# Altium PCB RasPiHAT-MOSFET.PcbDoc
Units mil, origin at the board's own origin, x right, y up, seen from the top; angles counter-clockwise.
Board outline 4248 x 2205 mil, 2 copper layers (Top, Bottom), stack 61.811 mil thick; 125 components, 92 nets, 378 pads, 166 vias.
Unrouted connection lines stored in the file: 21.
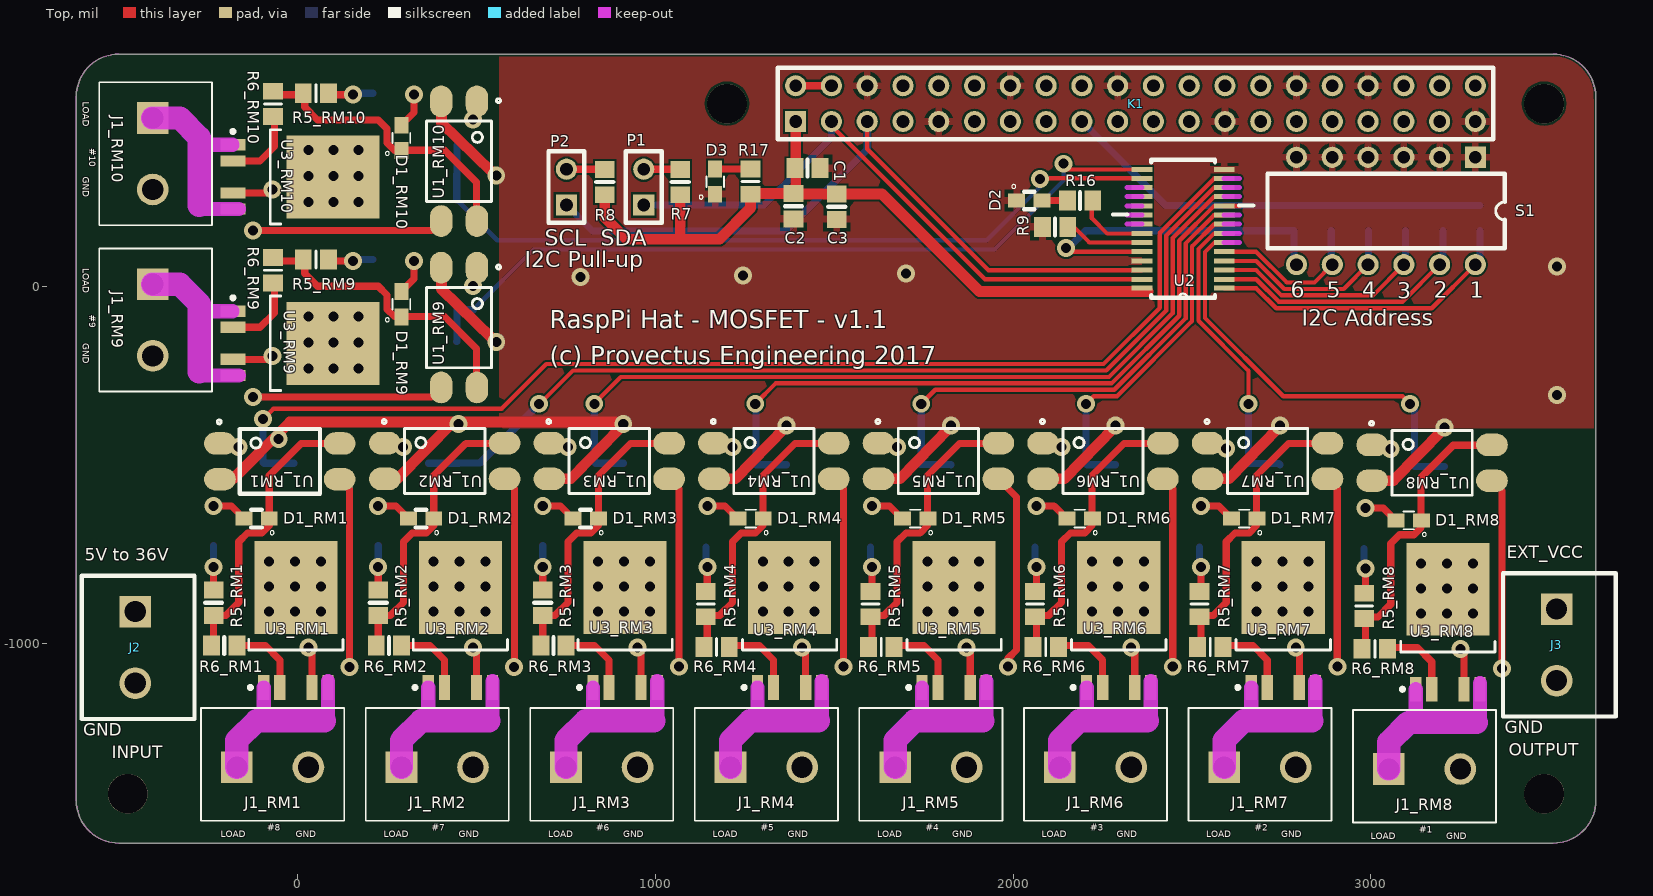
[diagram p0: Top view]
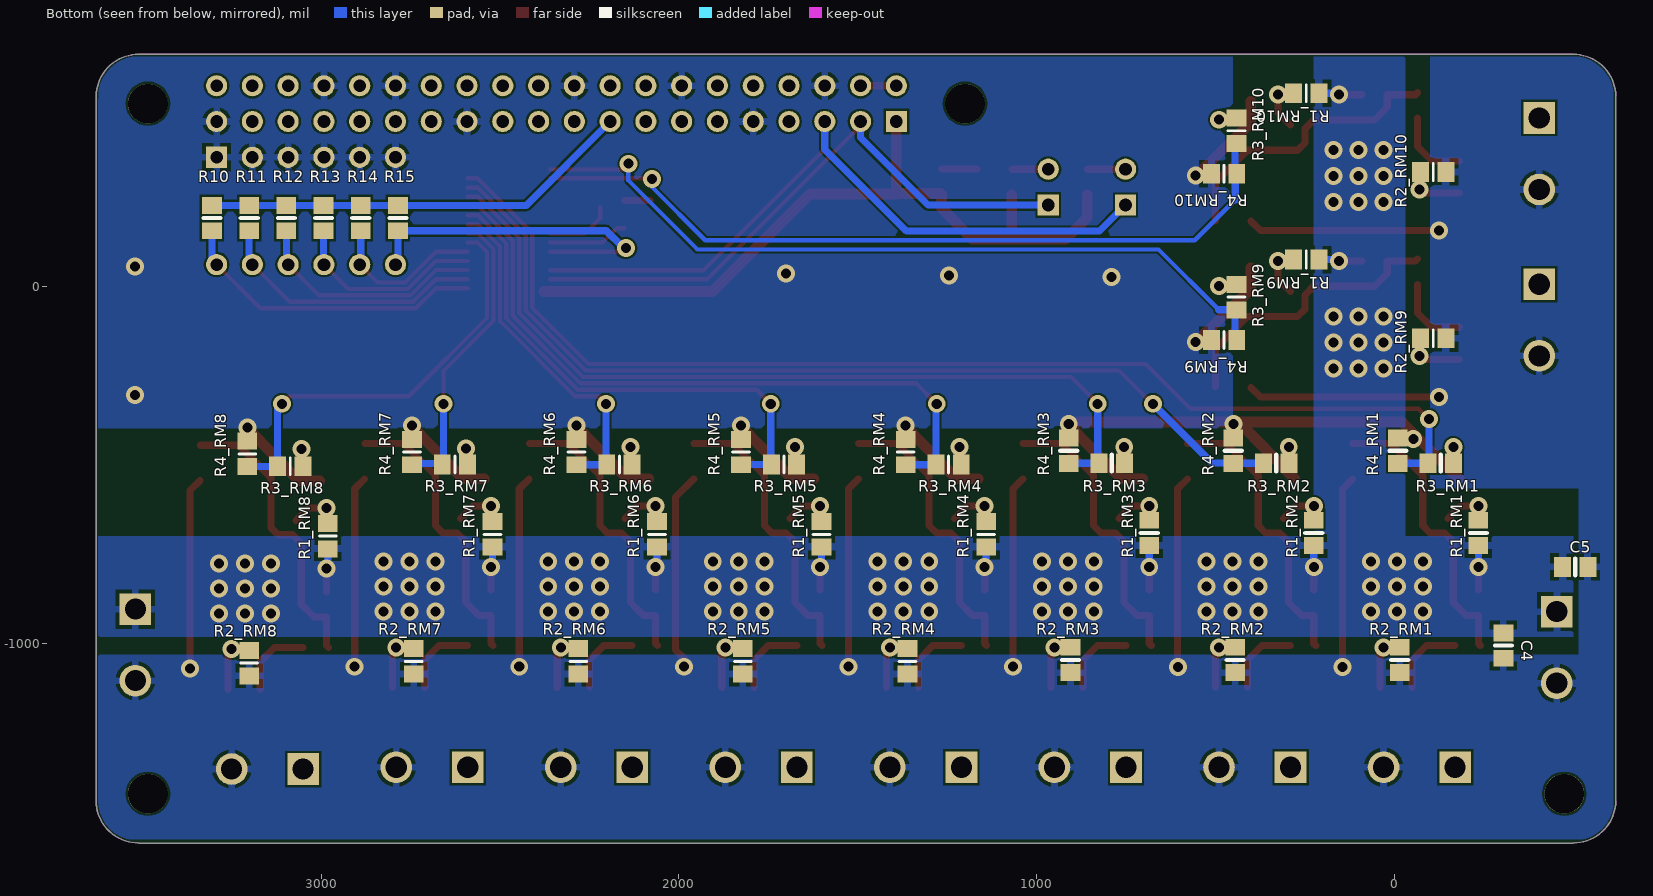
[diagram p1: Bottom view, seen from below]

## Layer stack, top to bottom
Top Solder: solder mask 0.4, Solder Resist, Dk 3.5
Top: signal copper 1.378
Dielectric 1: core 59.0551, FR-4, Dk 4.8
Bottom: signal copper 1.378
Bottom Solder: solder mask 0.4, Solder Resist, Dk 3.5

## Board outline
-500,-1557 cw(c-500,-1438) -619,-1438 -618.5,-1438 -618.5,530 -619,530 cw(c-500.5,529.5) -500,648 3509.5,648 cw(c3510,529.5) 3628.5,530 3629,530 3629,-1438 cw(c3510,-1438) 3510,-1557

## Design rules (kind name [scope] priority, off if disabled: settings)
Clearance mdViaVia [IsVia vs IsVia] p1: gap=6 ignorepadtopadclearanceinfootprint=FALSE except(0: Arc-Hole Track-Hole SMDPad-Hole THPad-Hole Via-Hole Fill-Hole Poly-Hole Region-Hole Text-Hole)
Clearance mdPadVia [IsPad vs IsVia] p2: gap=6 ignorepadtopadclearanceinfootprint=FALSE except(0: Arc-Hole Track-Hole SMDPad-Hole THPad-Hole Via-Hole Fill-Hole Poly-Hole Region-Hole Text-Hole)
Clearance mdPadPad [IsPad vs IsPad] p3: gap=6 ignorepadtopadclearanceinfootprint=FALSE except(0: Arc-Hole Track-Hole SMDPad-Hole THPad-Hole Via-Hole Fill-Hole Poly-Hole Region-Hole Text-Hole)
Clearance mdWireVia [(InLayerClass('Signal Layers') AND IsTrack) vs IsVia] p4: gap=6 ignorepadtopadclearanceinfootprint=FALSE except(0: Arc-Hole Track-Hole SMDPad-Hole THPad-Hole Via-Hole Fill-Hole Poly-Hole Region-Hole Text-Hole)
Clearance mdWirePad [(InLayerClass('Signal Layers') AND IsTrack) vs IsPad] p5: gap=6 ignorepadtopadclearanceinfootprint=FALSE except(0: Arc-Hole Track-Hole SMDPad-Hole THPad-Hole Via-Hole Fill-Hole Poly-Hole Region-Hole Text-Hole)
Clearance mdWireWire [(InLayerClass('Signal Layers') AND IsTrack) vs (InLayerClass('Signal Layers') AND IsTrack)] p6: gap=6 ignorepadtopadclearanceinfootprint=FALSE except(0: Arc-Hole Track-Hole SMDPad-Hole THPad-Hole Via-Hole Fill-Hole Poly-Hole Region-Hole Text-Hole)
Clearance [All] p7: gap=6 ignorepadtopadclearanceinfootprint=FALSE except(0: Arc-Hole Track-Hole SMDPad-Hole THPad-Hole Via-Hole Fill-Hole Poly-Hole Region-Hole Text-Hole)
HoleSize [All] p1: absolutevalues=TRUE maxlimit=100000 minlimit=12 maxpercent=80.000 minpercent=20.000
HoleToHoleClearance [All] p1: gap=8 allowstackedmicrovias=TRUE
PolygonConnect PolygonConnect_DIRECT [HasFootprint('INF-PG-TO252-5-11_N')] p1: connectstyle=Direct reliefconductorwidth=30 reliefentries=4 polygonreliefangle="90 Angle" airgapwidth=10
PolygonConnect ThermalVias [IsVia] p2: connectstyle=Direct reliefconductorwidth=10 reliefentries=4 polygonreliefangle="90 Angle" airgapwidth=10
PolygonConnect [All] p3: connectstyle=Relief reliefconductorwidth=20 reliefentries=4 polygonreliefangle="90 Angle" airgapwidth=10
RoomDefinition RM10 [InComponentClass('RM10')] p1: confinementstyle=ConfineIn formatcopy=TRUE lockcomponents=FALSE outline -615,580 -615,125 580,125 580,580
RoomDefinition RM9 [InComponentClass('RM9')] p2: confinementstyle=ConfineIn formatcopy=TRUE lockcomponents=FALSE outline -615,115 -615,-340 580,-340 580,115
RoomDefinition RM8 [InComponentClass('RM8')] p3: confinementstyle=ConfineIn formatcopy=TRUE lockcomponents=FALSE outline 2940,-1560 3395,-1560 3395,-365 2940,-365
RoomDefinition RM7 [InComponentClass('RM7')] p4: confinementstyle=ConfineIn formatcopy=TRUE lockcomponents=FALSE outline 2480,-1555 2935,-1555 2935,-360 2480,-360
RoomDefinition RM6 [InComponentClass('RM6')] p5: confinementstyle=ConfineIn formatcopy=TRUE lockcomponents=FALSE outline 2020,-1555 2475,-1555 2475,-360 2020,-360
RoomDefinition RasPiHAT-MOSFET [InComponentClass('RasPiHAT-MOSFET')] p6: confinementstyle=ConfineIn formatcopy=TRUE lockcomponents=FALSE outline 3629,655 -625,655 -625,-1559 3629,-1559
RoomDefinition RM1 [InComponentClass('RM1')] p7: confinementstyle=ConfineIn formatcopy=TRUE lockcomponents=FALSE outline -280,-1555 175,-1555 175,-360 -280,-360
RoomDefinition RM4 [InComponentClass('RM4')] p8: confinementstyle=ConfineIn formatcopy=TRUE lockcomponents=FALSE outline 1100,-1555 1555,-1555 1555,-360 1100,-360
RoomDefinition RM5 [InComponentClass('RM5')] p9: confinementstyle=ConfineIn formatcopy=TRUE lockcomponents=FALSE outline 1560,-1555 2015,-1555 2015,-360 1560,-360
RoomDefinition RM2 [InComponentClass('RM2')] p10: confinementstyle=ConfineIn formatcopy=TRUE lockcomponents=FALSE outline 180,-1555 635,-1555 635,-360 180,-360
RoomDefinition RM3 [InComponentClass('RM3')] p11: confinementstyle=ConfineIn formatcopy=TRUE lockcomponents=FALSE outline 640,-1555 1095,-1555 1095,-360 640,-360
RoutingVias [All] p1: holewidth=28 width=50 viastyle="Through Hole" minholewidth=28 minwidth=50 maxholewidth=28 maxwidth=50
SilkToSilkClearance [All] p1 off: silktosilkclearance=10
SilkToSolderMaskClearance [IsPad] p1 off: minsilkscreentomaskgap=10 clearancetoexposedcopper=TRUE
SolderMaskExpansion [All] p1: expansion=2 istentingtop=FALSE
Width [All] p1: maxlimit=100000 minlimit=6 preferedwidth=10
26 further rules are at their usual default settings.

## Classes and differential pairs
component class RM2: D1_RM2 J1_RM2 R1_RM2 R2_RM2 R3_RM2 R4_RM2 R5_RM2 R6_RM2 R7_Designator3 R8_Designator3 R10_Designator3 R11_Designator3 U1_RM2 U2_Designator3 U3_RM2
component class RM3: D1_RM3 J1_RM3 R1_RM3 R2_RM3 R3_RM3 R4_RM3 R5_RM3 R6_RM3 R7_Designator4 R8_Designator4 R10_Designator4 R11_Designator4 U1_RM3 U2_Designator4 U3_RM3
component class RM4: D1_RM4 J1_RM4 R1_RM4 R2_RM4 R3_RM4 R4_RM4 R5_RM4 R6_RM4 R7_Designator5 R8_Designator5 R10_Designator5 R11_Designator5 U1_RM4 U2_Designator5 U3_RM4
component class RasPiHAT-MOSFET: C1 C2 C3 C4 C5 D2 D3 K1 P1 P2 R7 R8 R9 R10 R11 R12 R13 R14 R15 R16 R17 S1 U2
channel class MOSFETPowerStage: Designator1 Designator2 Designator3 Designator4 Designator5 Designator6
component class RM1: D1_RM1 J1_RM1 R1_RM1 R2_RM1 R3_RM1 R4_RM1 R5_RM1 R6_RM1 U1_RM1 U3_RM1
component class RM5: D1_RM5 J1_RM5 R1_RM5 R2_RM5 R3_RM5 R4_RM5 R5_RM5 R6_RM5 U1_RM5 U3_RM5
component class RM6: D1_RM6 J1_RM6 R1_RM6 R2_RM6 R3_RM6 R4_RM6 R5_RM6 R6_RM6 U1_RM6 U3_RM6
component class RM7: D1_RM7 J1_RM7 R1_RM7 R2_RM7 R3_RM7 R4_RM7 R5_RM7 R6_RM7 U1_RM7 U3_RM7
component class RM8: D1_RM8 J1_RM8 R1_RM8 R2_RM8 R3_RM8 R4_RM8 R5_RM8 R6_RM8 U1_RM8 U3_RM8
component class RM9: D1_RM9 J1_RM9 R1_RM9 R2_RM9 R3_RM9 R4_RM9 R5_RM9 R6_RM9 U1_RM9 U3_RM9
component class RM10: D1_RM10 J1_RM10 R1_RM10 R2_RM10 R3_RM10 R4_RM10 R5_RM10 R6_RM10 U1_RM10 U3_RM10

## Components (designator, comment, footprint, x,y, rotation, side; value= is the part's Value field where it differs from the comment)
C1 "Cap" 6-0805_N 1425,330 r180 top
C2 "Cap" 6-0805_N 1386,223 r90 top
C3 "Cap" 6-0805_N 1507,222 r90 top
C4 "Cap" 6-0805_N -305,-1005 r90 bottom
C5 "Cap" 6-0805_N -505.43,-785 r0 bottom
D1_RM1 "0805_LED" LEDSC200X125X70-2N_598-8160-107F(Primary) -115,-650 r180 top (schematic designator D1)
D1_RM2 "0805_LED" LEDSC200X125X70-2N_598-8160-107F(Primary) 345,-650 r180 top (schematic designator D1)
D1_RM3 "0805_LED" LEDSC200X125X70-2N_598-8160-107F(Primary) 805,-650 r180 top (schematic designator D1)
D1_RM4 "0805_LED" LEDSC200X125X70-2N_598-8160-107F(Primary) 1265.98,-650 r180 top (schematic designator D1)
D1_RM5 "0805_LED" LEDSC200X125X70-2N_598-8160-107F(Primary) 1725.98,-650 r180 top (schematic designator D1)
D1_RM6 "0805_LED" LEDSC200X125X70-2N_598-8160-107F(Primary) 2185.98,-650 r180 top (schematic designator D1)
D1_RM7 "0805_LED" LEDSC200X125X70-2N_598-8160-107F(Primary) 2645.98,-650 r180 top (schematic designator D1)
D1_RM8 "0805_LED" LEDSC200X125X70-2N_598-8160-107F(Primary) 3105.98,-655 r180 top (schematic designator D1)
D1_RM9 "0805_LED" LEDSC200X125X70-2N_598-8160-107F(Primary) 290,-50.98 r90 top (schematic designator D1)
D1_RM10 "0805_LED" LEDSC200X125X70-2N_598-8160-107F(Primary) 290,414.02 r90 top (schematic designator D1)
D2 "0805_LED" LEDSC200X125X70-2N_598-8160-107F(Primary) 2045,239 r0 top
D3 "0805_LED" LEDSC200X125X70-2N_598-8160-107F(Primary) 1167,292 r90 top
J1_RM1 "1760510000" 1760490000 -170,-1345 r0 top (schematic designator J1)
J1_RM2 "1760510000" 1760490000 290,-1345 r0 top (schematic designator J1)
J1_RM3 "1760510000" 1760490000 750,-1345 r0 top (schematic designator J1)
J1_RM4 "1760510000" 1760490000 1210,-1345 r0 top (schematic designator J1)
J1_RM5 "1760510000" 1760490000 1670,-1345 r0 top (schematic designator J1)
J1_RM6 "1760510000" 1760490000 2130,-1345 r0 top (schematic designator J1)
J1_RM7 "1760510000" 1760490000 2590,-1345 r0 top (schematic designator J1)
J1_RM8 "1760510000" 1760490000 3050,-1350 r0 top (schematic designator J1)
J1_RM9 "1760510000" 1760490000 -405,5 r270 top (schematic designator J1)
J1_RM10 "1760510000" 1760490000 -405,470 r270 top (schematic designator J1)
J2 "1760510000" 1760490000 -454,-910 r270 top
J3 "1760510000" 1760490000 3519,-903 r270 top (schematic designator J2)
K1 "PIN20X2" HDR2X20 1392,460 r0 top
P1 "Header 2" HDR1X2 967.27,226.61 r90 top
P2 "Header 2" HDR1X2 751.27,226.61 r90 top
R1_RM1 "Res1" 6-0805_N -235,-690 r90 bottom (schematic designator R1)
R1_RM2 "Res1" 6-0805_N 225,-690 r90 bottom (schematic designator R1)
R1_RM3 "Res1" 6-0805_N 685,-690 r90 bottom (schematic designator R1)
R1_RM4 "Res1" 6-0805_N 1140.97,-694.03 r90 bottom (schematic designator R1)
R1_RM5 "Res1" 6-0805_N 1600.97,-694.03 r90 bottom (schematic designator R1)
R1_RM6 "Res1" 6-0805_N 2060.97,-694.03 r90 bottom (schematic designator R1)
R1_RM7 "Res1" 6-0805_N 2520.97,-694.03 r90 bottom (schematic designator R1)
R1_RM8 "Res1" 6-0805_N 2980.97,-699.03 r90 bottom (schematic designator R1)
R1_RM9 "Res1" 6-0805_N 245.97,74.03 r0 bottom (schematic designator R1)
R1_RM10 "Res1" 6-0805_N 245.97,539.03 r0 bottom (schematic designator R1)
R2_RM1 "Res1" 6-0805_N -15,-1045 r270 bottom (schematic designator R2)
R2_RM2 "Res1" 6-0805_N 445,-1045 r270 bottom (schematic designator R2)
R2_RM3 "Res1" 6-0805_N 905,-1045 r270 bottom (schematic designator R2)
R2_RM4 "Res1" 6-0805_N 1360.97,-1049.03 r270 bottom (schematic designator R2)
R2_RM5 "Res1" 6-0805_N 1820.97,-1049.03 r270 bottom (schematic designator R2)
R2_RM6 "Res1" 6-0805_N 2280.97,-1049.03 r270 bottom (schematic designator R2)
R2_RM7 "Res1" 6-0805_N 2740.97,-1049.03 r270 bottom (schematic designator R2)
R2_RM8 "Res1" 6-0805_N 3200.97,-1054.03 r270 bottom (schematic designator R2)
R2_RM9 "Res1" 6-0805_N -109.03,-145.97 r180 bottom (schematic designator R2)
R2_RM10 "Res1" 6-0805_N -109.03,319.03 r180 bottom (schematic designator R2)
R3_RM1 "Res1" 6-0805_N -130,-495 r180 bottom (schematic designator R3)
R3_RM2 "Res1" 6-0805_N 330,-495 r180 bottom (schematic designator R3)
R3_RM3 "Res1" 6-0805_N 790,-495 r180 bottom (schematic designator R3)
R3_RM4 "Res1" 6-0805_N 1245.97,-499.03 r180 bottom (schematic designator R3)
R3_RM5 "Res1" 6-0805_N 1705.97,-499.03 r180 bottom (schematic designator R3)
R3_RM6 "Res1" 6-0805_N 2165.97,-499.03 r180 bottom (schematic designator R3)
R3_RM7 "Res1" 6-0805_N 2625.97,-499.03 r180 bottom (schematic designator R3)
R3_RM8 "Res1" 6-0805_N 3085.97,-504.03 r180 bottom (schematic designator R3)
R3_RM9 "Res1" 6-0805_N 440.97,-30.97 r90 bottom (schematic designator R3)
R3_RM10 "Res1" 6-0805_N 440.97,434.03 r90 bottom (schematic designator R3)
R4_RM1 "Res1" 6-0805_N -10,-460 r90 bottom (schematic designator R4)
R4_RM2 "Res1" 6-0805_N 450,-460 r90 bottom (schematic designator R4)
R4_RM3 "Res1" 6-0805_N 910,-460 r90 bottom (schematic designator R4)
R4_RM4 "Res1" 6-0805_N 1365.97,-464.03 r90 bottom (schematic designator R4)
R4_RM5 "Res1" 6-0805_N 1825.97,-464.03 r90 bottom (schematic designator R4)
R4_RM6 "Res1" 6-0805_N 2285.97,-464.03 r90 bottom (schematic designator R4)
R4_RM7 "Res1" 6-0805_N 2745.97,-464.03 r90 bottom (schematic designator R4)
R4_RM8 "Res1" 6-0805_N 3205.97,-469.03 r90 bottom (schematic designator R4)
R4_RM9 "Res1" 6-0805_N 475.97,-150.97 r0 bottom (schematic designator R4)
R4_RM10 "Res1" 6-0805_N 475.97,314.03 r0 bottom (schematic designator R4)
R5_RM1 "Res1" 6-0805_N -235,-885 r270 top (schematic designator R5)
R5_RM2 "Res1" 6-0805_N 225,-885 r270 top (schematic designator R5)
R5_RM3 "Res1" 6-0805_N 685,-885 r270 top (schematic designator R5)
R5_RM4 "Res1" 6-0805_N 1140.97,-889.03 r270 top (schematic designator R5)
R5_RM5 "Res1" 6-0805_N 1600.97,-889.03 r270 top (schematic designator R5)
R5_RM6 "Res1" 6-0805_N 2060.97,-889.03 r270 top (schematic designator R5)
R5_RM7 "Res1" 6-0805_N 2520.97,-889.03 r270 top (schematic designator R5)
R5_RM8 "Res1" 6-0805_N 2980.97,-894.03 r270 top (schematic designator R5)
R5_RM9 "Res1" 6-0805_N 50.97,74.03 r180 top (schematic designator R5)
R5_RM10 "Res1" 6-0805_N 50.97,539.03 r180 top (schematic designator R5)
R6_RM1 "Res1" 6-0805_N -205,-1005 r0 top (schematic designator R6)
R6_RM2 "Res1" 6-0805_N 255,-1005 r0 top (schematic designator R6)
R6_RM3 "Res1" 6-0805_N 715,-1005 r0 top (schematic designator R6)
R6_RM4 "Res1" 6-0805_N 1170.97,-1009.03 r0 top (schematic designator R6)
R6_RM5 "Res1" 6-0805_N 1630.97,-1009.03 r0 top (schematic designator R6)
R6_RM6 "Res1" 6-0805_N 2090.97,-1009.03 r0 top (schematic designator R6)
R6_RM7 "Res1" 6-0805_N 2550.97,-1009.03 r0 top (schematic designator R6)
R6_RM8 "Res1" 6-0805_N 3010.97,-1014.03 r0 top (schematic designator R6)
R6_RM9 "Res1" 6-0805_N -69.03,44.03 r270 top (schematic designator R6)
R6_RM10 "Res1" 6-0805_N -69.03,509.03 r270 top (schematic designator R6)
R7 "Res1" 6-0805_N 1069.27,290.61 r90 top
R8 "Res1" 6-0805_N 858.27,290.61 r90 top
R9 "Res1" 6-0805_N 2117,165 r0 top
R10 "Res1" 6-0805_N 3305,190 r270 bottom
R11 "Res1" 6-0805_N 3201,190 r270 bottom
R12 "Res1" 6-0805_N 3097,190 r270 bottom
R13 "Res1" 6-0805_N 2993,190 r270 bottom
R14 "Res1" 6-0805_N 2889,190 r270 bottom
R15 "Res1" 6-0805_N 2785,190 r270 bottom
R16 "Res1" 6-0805_N 2187,239 r180 top
R17 "Res1" 6-0805_N 1266,292 r90 top
S1 "SW DIP-6" DIP-12/SW 3042,210 r180 top
U1_RM1 "PC817X2NIP0F" SOT254P975X400-4N -50,-490 r0 top (schematic designator U1)
U1_RM2 "PC817X2NIP0F" SOT254P975X400-4N 411.02,-488.98 r0 top (schematic designator U1)
U1_RM3 "PC817X2NIP0F" SOT254P975X400-4N 871.02,-488.98 r0 top (schematic designator U1)
U1_RM4 "PC817X2NIP0F" SOT254P975X400-4N 1331.02,-488.98 r0 top (schematic designator U1)
U1_RM5 "PC817X2NIP0F" SOT254P975X400-4N 1791.02,-488.98 r0 top (schematic designator U1)
U1_RM6 "PC817X2NIP0F" SOT254P975X400-4N 2251.02,-488.98 r0 top (schematic designator U1)
U1_RM7 "PC817X2NIP0F" SOT254P975X400-4N 2711.02,-488.98 r0 top (schematic designator U1)
U1_RM8 "PC817X2NIP0F" SOT254P975X400-4N 3171.02,-493.98 r0 top (schematic designator U1)
U1_RM9 "PC817X2NIP0F" SOT254P975X400-4N 451.02,-116.02 r270 top (schematic designator U1)
U1_RM10 "PC817X2NIP0F" SOT254P975X400-4N 451.02,348.98 r270 top (schematic designator U1)
U2 "PCA9685PW" SOP65P640X110-28N 2475,160 r180 top locked
U3_RM1 "BTS443P" INF-PG-TO252-5-11_N -5,-935 r90 top (schematic designator U3)
U3_RM2 "BTS443P" INF-PG-TO252-5-11_N 455,-935 r90 top (schematic designator U3)
U3_RM3 "BTS443P" INF-PG-TO252-5-11_N 915,-935 r90 top (schematic designator U3)
U3_RM4 "BTS443P" INF-PG-TO252-5-11_N 1375,-935 r90 top (schematic designator U3)
U3_RM5 "BTS443P" INF-PG-TO252-5-11_N 1835,-935 r90 top (schematic designator U3)
U3_RM6 "BTS443P" INF-PG-TO252-5-11_N 2295,-935 r90 top (schematic designator U3)
U3_RM7 "BTS443P" INF-PG-TO252-5-11_N 2755,-935 r90 top (schematic designator U3)
U3_RM8 "BTS443P" INF-PG-TO252-5-11_N 3215,-940 r90 top (schematic designator U3)
U3_RM9 "BTS443P" INF-PG-TO252-5-11_N 6,-160 r0 top (schematic designator U3)
U3_RM10 "BTS443P" INF-PG-TO252-5-11_N 6,305 r0 top (schematic designator U3)

## Footprints (in the part's own frame and the unit in brackets; to place one, negate y for a bottom-side part, rotate by r counter-clockwise, add the part's x,y. Pads: shape width x height; smd on the part's side, far side on the other; paste and mask are expansions set on the pad)
6-0805_N [mm] "Chip Resistor, Body 2.0x1.2mm, IPC Medium Density"
  rect 1.2x1.4 smd: 1(-0.9,0) 2(0.9,0)
  silkscreen extent 0,-0.6 0,0.6, body extent -1.07,-0.7 1.07,0.7, height 0.7
1760490000 [mm]
  rect 2.25x2.25 hole 1.5 mask-25.4: 1(0,0)
  round 2.25 hole 1.5 mask-25.4: 2(5.08,0)
  silkscreen extent -2.54,-3.8 7.62,4.2
DIP-12/SW [mm] "DIP Switch; 12 Leads"
  rect 1.5x1.5 hole 0.9: 1(-6.35,-3.81)
  round 1.5 hole 0.9: 2(-3.81,-3.81) 3(-1.27,-3.81) 4(1.27,-3.81) 5(3.81,-3.81) 6(6.35,-3.81) 7(6.35,3.81) 8(3.81,3.81) 9(1.27,3.81) 10(-1.27,3.81) 11(-3.81,3.81) 12(-6.35,3.81)
  silkscreen extent -8.43,-2.65 8.41,2.65
HDR1X2 [mm] "Connector; Header; 2 Position"
  rect 1.5x1.5 hole 0.9: 1(0,0)
  round 1.5 hole 0.9: 2(2.54,0)
  silkscreen extent -1.27,-1.27 3.81,1.27
HDR2X20 [mm] "Connector; Header; 20x2 Position"
  rect 1.5x1.5 hole 0.9: 1(0,0)
  round 1.5 hole 0.9: 2(0,2.54) 3(2.54,0) 4(2.54,2.54) 5(5.08,0) 6(5.08,2.54) 7(7.62,0) 8(7.62,2.54) 9(10.16,0) 10(10.16,2.54) 11(12.7,0) 12(12.7,2.54) 13(15.24,0) 14(15.24,2.54) 15(17.78,0) 16(17.78,2.54) 17(20.32,0) 18(20.32,2.54) 19(22.86,0) 20(22.86,2.54) 21(25.4,0) 22(25.4,2.54) 23(27.94,0) 24(27.94,2.54) 25(30.48,0) 26(30.48,2.54) 27(33.02,0) 28(33.02,2.54) 29(35.56,0) 30(35.56,2.54) 31(38.1,0) 32(38.1,2.54) 33(40.64,0) 34(40.64,2.54) 35(43.18,0) 36(43.18,2.54) 37(45.72,0) 38(45.72,2.54) 39(48.26,0) 40(48.26,2.54)
  silkscreen extent -1.27,-1.27 49.53,3.81
INF-PG-TO252-5-11_N [mm] "DPAK, 5-Leads, Body 6.5x6.12mm, Pitch 1.14mm, IPC Medium Density"
  rect 1.75x0.8 smd: 1(-4.75,2.28) 2(-4.75,1.14) 4(-4.75,-1.14) 5(-4.75,-2.28)
  rect 6.6x5.9 smd: 3(2.35,0)
  silkscreen extent -4.87,-3.35 -1.35,3.35, body extent -2.1,-3.32 4.12,3.32, height 2.35
LEDSC200X125X70-2N_598-8160-107F(Primary) [mm]
  rect 1.2x1 smd paste-25.4 mask-25.4: A(0.9,0) C(-0.9,0)
  silkscreen extent -1.24,-0.63 0.38,1.14
SOP65P640X110-28N [mil]
  rect 58x14 smd paste-1000 mask-1000: 1(-115,166) 2(-115,141) 3(-115,115) 4(-115,90) 5(-115,64) 6(-115,38) 7(-115,13) 8(-115,-13) 9(-115,-38) 10(-115,-64) 11(-115,-90) 12(-115,-115) 13(-115,-141) 14(-115,-166) 15(115,-166) 16(115,-141) 18(115,-90) 19(115,-64) 20(115,-38) 21(115,-13) 22(115,13) 23(115,38) 24(115,64) 25(115,90) 26(115,115) 27(115,141) 28(115,166)
  rect 58x14 smd paste+0 mask-1000: 17(115,-115)
  silkscreen extent -196,-193 196,193
SOT254P975X400-4N [mm]
  oval 2.25x1.6 smd paste-25.4: 1(-4.25,1.27) 2(-4.25,-1.27) 3(4.25,-1.27) 4(4.25,1.27)
  silkscreen extent -4.44,-2.3 2.85,2.94

## Part data
C1 C2 C3 C4 C5: "Capacitor"
D1_RM1 D1_RM2 D1_RM3 D1_RM4 D1_RM5 D1_RM6 D1_RM7 D1_RM8 D1_RM9 D1_RM10 D2 D3: library part 598-8160-107F, "LED, SMD; 0805; Yellow-Green; Water Clear Lens; 40mcd; 570/575nm"
J1_RM1 J1_RM2 J1_RM3 J1_RM4 J1_RM5 J1_RM6 J1_RM7 J1_RM8 J1_RM9 J1_RM10 J2 J3: "Conn Terminal Block 2 POS 5.08mm Solder ST Thru-Hole 16A"
P1 P2: "Header, 2-Pin"
R1_RM1 R1_RM2 R1_RM3 R1_RM4 R1_RM5 R1_RM6 R1_RM7 R1_RM8 R1_RM9 R1_RM10 R2_RM1 R2_RM2 R2_RM3 R2_RM4 R2_RM5 R2_RM6 R2_RM7 R2_RM8 R2_RM9 R2_RM10 R3_RM1 R3_RM2 R3_RM3 R3_RM4 R3_RM5 R3_RM6 R3_RM7 R3_RM8 R3_RM9 R3_RM10 R4_RM1 R4_RM2 R4_RM3 R4_RM4 R4_RM5 R4_RM6 R4_RM7 R4_RM8 R4_RM9 R4_RM10 R5_RM1 R5_RM2 R5_RM3 R5_RM4 R5_RM5 R5_RM6 R5_RM7 R5_RM8 R5_RM9 R5_RM10 R6_RM1 R6_RM2 R6_RM3 R6_RM4 R6_RM5 R6_RM6 R6_RM7 R6_RM8 R6_RM9 R6_RM10 R7 R8 R9 R10 R11 R12 R13 R14 R15 R16 R17: "Resistor"
S1: "DIP Switch, 6 Position, SPST"
U1_RM1 U1_RM2 U1_RM3 U1_RM4 U1_RM5 U1_RM6 U1_RM7 U1_RM8 U1_RM9 U1_RM10: "PC817 Series 1 Channel 80 V 5000 Vrms General Purpose Photocoupler - DIP-4"
U2: "SMD IC LED DRVR, LIN DIM 25MA, 16 channels, 12bit"
U3_RM1 U3_RM2 U3_RM3 U3_RM4 U3_RM5 U3_RM6 U3_RM7 U3_RM8 U3_RM9 U3_RM10: "Smart High-Side Power Switch, 1 Channel, 7.6 A Load Current, -40 to 150 degC, PG-TO252-5-11, Reel, Green"

## Free pads (board coordinates)
  round 111 hole 111: 1(-475,-1419) 1(1200,510) 1(3484,-1419) 1(3484,510)

## Via types
v1: diameter 50, hole 28, Top to Bottom, 166 vias

## Nets (pads, with @x,y where several pads share a name; then routed paths per layer and width w, separated by ;. In a path a pad name is that pad's centre, name@x,y a point inside that pad or via, vN(x,y) a via of type N, cw(c..) or ccw(c..) an arc to the next point about the centre after c; other vN are vias at no path point)
+3V3: C1.2 C2.2 C3.2 K1.1 K1.17 R7.1 R8.1 R10.1 R11.1 R12.1 R13.1 R14.1 R15.1 R17.1 U2.28 | length 3326.5
  Top w30: R8.1 858.27,191.73 919,131 1069.27,131 ; R7.1 1069.27,131 ; C2.2 1267.87,258.43 R17.1 1266,218 1179,131 1069.27,131 ; K1.1 1392,257.43 C3.2 1633.57,257.43 1906,-15 2377,-15
  Bottom w20: K1.17 2426.57,225.43 R15.1 R14.1 R13.1 R12.1 R11.1 R10.1
+5V: K1.2 K1.4 | length 100
  Top w20: K1.2 K1.4
CH1: R3_RM8.1 R4_RM8.1 U2.6 | length 1186.5
  Top w12: U2.6 2563,122 2536,95 2536,-89 2755,-308 3088,-308 v1(3109,-329)
  Bottom w20: v1(3109,-329) 3121.4,-341.4 R3_RM8.1 3205.54,-504.03 R4_RM8.1
CH2: R3_RM7.1 R4_RM7.1 U2.7 | length 836.7
  Top w12: U2.7 2561.46,147 2518,103.54 2518,-97 2658,-237 v1(2658,-329)
  Bottom w20: v1(2658,-329) 2658,-495.63 2742.13,-495.63 R4_RM7.1
CH3: R3_RM6.1 R4_RM6.1 U2.8 | length 967
  Top w12: v1(2204,-329) 2225,-308 2290,-308 2500,-98 2500,111 2562,173 U2.8
  Bottom w20: v1(2204,-329) 2204,-496.43 2207.03,-499.46 R4_RM6.1
CH4: R3_RM5.1 R4_RM5.1 U2.9 | length 1443.5
  Top w12: v1(1743,-329) 1782,-290 2282.54,-290 2482,-90.54 2482,119 2561,198 U2.9
  Bottom w20: v1(1743,-329) 1743,-497.43 R3_RM5.1 1825.54,-499.03 R4_RM5.1
CH5: R3_RM4.1 R4_RM4.1 U2.10 | length 1960.7
  Top w12: v1(1279,-329) 1336,-272 2275.09,-272 2464,-83.09 2464,126.63 2561.37,224 U2.10
  Top w14: U2.10 2632,224
  Bottom w20: v1(1279,-329) 1281.4,-331.4 R3_RM4.1 1281.83,-499.46 R4_RM4.1
CH6: R3_RM3.1 R4_RM3.1 U2.11 | length 2358.5
  Top w12: v1@836,-321 903,-254 2267.63,-254 2446,-75.63 2446,134.09 2561.91,250 U2.11
  Bottom w20: v1(829,-329) 829,-491.43 833,-495.43 R4_RM3.1
CH7: R3_RM2.1 R4_RM2.1 U2.12 | length 2740.6
  Top w12: v1@683,-323 770,-236 2260.18,-236 2428,-68.18 2428,141.54 2561.46,275 U2.12
  Bottom w20: R4_RM2.1 365.87,-495.43 R3_RM2.1 509,-495 v1(675,-329)
CH8: R3_RM1.1 R4_RM1.1 U2.13 | length 3297.4
  Top w12: v1(-97,-372) -68,-343 570,-343 695,-218 2252.72,-218 2410,-60.72 2410,149 2562,301 U2.13
  Bottom w20: v1(-97,-372) -97,-492.57 R3_RM1.1 -94.13,-495.43 R4_RM1.1
CH9: R3_RM9.1 R4_RM9.1 U2.15 | length 2225.2
  Top w12: v1(2141,342) 2134,335 2143,326 U2.15
  Bottom w12: R3_RM9.1 R3_RM9.1@445,-66.4 ; 490.6,-66.4 659,102 1948.07,102 2141,294.93 v1(2141,342)
  Bottom w20: R4_RM9.1@444.57,-155 445,-154.57 445,-66.4 490.6,-66.4
CH10: R3_RM10.1 R4_RM10.1 U2.16 | length 2177.6
  Top w12: 2102,301 U2.16
  Bottom w12: R4_RM10.1 R4_RM10.1@444.57,310 ; 444.57,241.43 558,128 1926,128 v1@2076,278 ; v1@2075,279 v1(2075,299)
  Bottom w20: 444.57,241.43 444.57,310 445,310.43 R3_RM10.1@445,394.57
EEPROM_WC: K1.11
EXT_VCC: C4.2 C5.2 J2.1 J3.1 R1_RM1.1 R1_RM2.1 R1_RM3.1 R1_RM4.1 R1_RM5.1 R1_RM6.1 R1_RM7.1 R1_RM8.1 R1_RM9.1 R1_RM10.1 R5_RM1.1 R5_RM2.1 R5_RM3.1 R5_RM4.1 R5_RM5.1 R5_RM6.1 R5_RM7.1 R5_RM8.1 R5_RM9.1 R5_RM10.1 U3_RM1.3 U3_RM2.3 U3_RM3.3 U3_RM4.3 U3_RM5.3 U3_RM6.3 U3_RM7.3 U3_RM8.3 U3_RM9.3 U3_RM10.3 | length 1224.8
  Top w20: R5_RM1.1 v1(-235,-785) ; R5_RM9.1@90.43,70 v1(155,70) ; R5_RM10.1@90.43,535 v1(155,535) ; R5_RM2.1 v1(225,-785) ; R5_RM3.1 v1(685,-785) ; R5_RM4.1@1145,-849.57 v1(1145,-785) ; R5_RM5.1@1605,-849.57 v1(1605,-785) ; R5_RM6.1@2065,-849.57 v1(2065,-785) ; R5_RM7.1@2525,-849.57 v1(2525,-785) ; R5_RM8.1@2985,-854.57 v1(2985,-790)
  Bottom w20: v1(-235,-785) R1_RM1.1 ; v1(155,70) 159.03,74.03 R1_RM9.1 ; v1(155,535) 159.03,539.03 R1_RM10.1 ; v1(225,-785) R1_RM2.1 ; v1(685,-785) R1_RM3.1 ; R1_RM4.1 1140.97,-780.97 v1(1145,-785) ; R1_RM5.1 1600.97,-780.97 v1(1605,-785) ; R1_RM6.1 2060.97,-780.97 v1(2065,-785) ; R1_RM7.1 2520.97,-780.97 v1(2525,-785) ; R1_RM8.1 2980.97,-785.97 v1(2985,-790)
  other v1: 3140,-915 3212.5,-915 3285,-915 -80,-910 -7.5,-910 65,-910 380,-910 452.5,-910 525,-910 840,-910 912.5,-910 985,-910 1300,-910 1372.5,-910 1445,-910 1760,-910 1832.5,-910 1905,-910 2220,-910 2292.5,-910 2365,-910 2680,-910 2752.5,-910 2825,-910 3140,-845 3212.5,-845 3285,-845 -80,-840 -7.5,-840 65,-840 380,-840 452.5,-840 525,-840 840,-840 912.5,-840 985,-840 1300,-840 1372.5,-840 1445,-840 1760,-840 1832.5,-840 1905,-840 2220,-840 2292.5,-840 2365,-840 2680,-840 2752.5,-840 2825,-840 3140,-775 3212.5,-775 3285,-775 -80,-770 -7.5,-770 65,-770 380,-770 452.5,-770 525,-770 840,-770 912.5,-770 985,-770 1300,-770 1372.5,-770 1445,-770 1760,-770 1832.5,-770 1905,-770 2220,-770 2292.5,-770 2365,-770 2680,-770 2752.5,-770 2825,-770 30,-230 100,-230 170,-230 30,-157.5 100,-157.5 170,-157.5 30,-85 100,-85 170,-85 30,235 100,235 170,235 30,307.5 100,307.5 170,307.5 30,380 100,380 170,380
GND: C1.1 C2.1 C3.1 D2.C D3.C K1.6 K1.9 K1.14 K1.20 K1.25 K1.30 K1.34 K1.39 R4_RM1.2 R4_RM2.2 R4_RM3.2 R4_RM4.2 R4_RM5.2 R4_RM6.2 R4_RM7.2 R4_RM8.2 R4_RM9.2 R4_RM10.2 R9.1 S1.1 S1.2 S1.3 S1.4 S1.5 S1.6 U1_RM1.2 U1_RM2.2 U1_RM3.2 U1_RM4.2 U1_RM5.2 U1_RM6.2 U1_RM7.2 U1_RM8.2 U1_RM9.2 U1_RM10.2 U2.14 U2.25 | length 3443.7
  Top w30: U1_RM1.2@-180.98,-538.98 -27.97,-385.97 -21.97,-379.97 434.03,-379.97 U1_RM2.2@279.02,-538.98 ; U1_RM9.2 401.78,-8.36 v1@544,-147 ; U1_RM10.2 401.78,456.64 v1@544,318 ; v1@434.03,-380 886,-380 902,-396 763.36,-538.22 U1_RM3.2 ; U1_RM4.2 1223.36,-538.22 v1@1362,-396 ; U1_RM5.2 1683.36,-538.22 v1@1822,-396 ; U1_RM6.2 2143.36,-538.22 v1@2282,-396 ; U1_RM7.2 2603.36,-538.22 v1@2742,-396 ; U1_RM8.2 3063.36,-543.22 v1@3202,-401
  other v1: -53,-427 3206,-395 1366,-390 1826,-390 2286,-390 2746,-390 450,-386 910.03,-385.97 3520,-305 555.06,-156.06 790,25 1245,30 1700,35 3520,55 555.06,308.94
INTERRUPT: K1.7
NetD1_RM1_A: D1_RM1.A R1_RM1.2 | length 99.1
  Top w20: v1(-235,-615) -185.43,-615 D1_RM1.A
NetD1_RM1_C: D1_RM1.C R5_RM1.2 R6_RM1.1 U1_RM1.4 | length 819.7
  Top w20: R6_RM1.1 -235,-999.57 R5_RM1.2 -200.43,-920.43 -164.57,-884.57 -164.57,-714.57 -140,-690 -100,-690 -79.57,-669.57 D1_RM1.C -79.57,-529.57 10,-440 U1_RM1.4
NetD1_RM2_A: D1_RM2.A R1_RM2.2 | length 99.1
  Top w20: v1(225,-615) 274.57,-615 D1_RM2.A
NetD1_RM2_C: D1_RM2.C R5_RM2.2 R6_RM2.1 U1_RM2.4 | length 819.7
  Top w20: R6_RM2.1 225,-999.57 R5_RM2.2 259.57,-920.43 295.43,-884.57 295.43,-714.57 320,-690 360,-690 380.43,-669.57 D1_RM2.C 380.43,-529.57 470,-440 U1_RM2.4@577.32,-440
NetD1_RM3_A: D1_RM3.A R1_RM3.2 | length 99.1
  Top w20: v1(685,-615) 734.57,-615 D1_RM3.A
NetD1_RM3_C: D1_RM3.C R5_RM3.2 R6_RM3.1 U1_RM3.4 | length 819.7
  Top w20: R6_RM3.1 685,-999.57 R5_RM3.2 719.57,-920.43 755.43,-884.57 755.43,-714.57 780,-690 820,-690 840.43,-669.57 D1_RM3.C 840.43,-529.57 930,-440 U1_RM3.4@1037.32,-440
NetD1_RM4_A: D1_RM4.A R1_RM4.2 | length 99.1
  Top w20: v1(1145,-615) 1194.57,-615 D1_RM4.A@1229.57,-650
NetD1_RM4_C: D1_RM4.C R5_RM4.2 R6_RM4.1 U1_RM4.4 | length 819.7
  Top w20: R6_RM4.1@1139.57,-1005 1145,-999.57 1145,-920.43 1179.57,-920.43 1215.43,-884.57 1215.43,-714.57 1240,-690 1280,-690 1300.43,-669.57 1300.43,-650 1300.43,-529.57 1390,-440 U1_RM4.4@1497.32,-440
NetD1_RM5_A: D1_RM5.A R1_RM5.2 | length 99.1
  Top w20: v1(1605,-615) 1654.57,-615 D1_RM5.A@1689.57,-650
NetD1_RM5_C: D1_RM5.C R5_RM5.2 R6_RM5.1 U1_RM5.4 | length 819.7
  Top w20: R6_RM5.1@1599.57,-1005 1605,-999.57 1605,-920.43 1639.57,-920.43 1675.43,-884.57 1675.43,-714.57 1700,-690 1740,-690 1760.43,-669.57 1760.43,-650 1760.43,-529.57 1850,-440 U1_RM5.4@1957.32,-440
NetD1_RM6_A: D1_RM6.A R1_RM6.2 | length 99.1
  Top w20: v1(2065,-615) 2114.57,-615 D1_RM6.A@2149.57,-650
NetD1_RM6_C: D1_RM6.C R5_RM6.2 R6_RM6.1 U1_RM6.4 | length 819.7
  Top w20: R6_RM6.1@2059.57,-1005 2065,-999.57 2065,-920.43 2099.57,-920.43 2135.43,-884.57 2135.43,-714.57 2160,-690 2200,-690 2220.43,-669.57 2220.43,-650 2220.43,-529.57 2310,-440 U1_RM6.4@2417.32,-440
NetD1_RM7_A: D1_RM7.A R1_RM7.2 | length 99.1
  Top w20: v1(2525,-615) 2574.57,-615 D1_RM7.A@2609.57,-650
NetD1_RM7_C: D1_RM7.C R5_RM7.2 R6_RM7.1 U1_RM7.4 | length 819.7
  Top w20: R6_RM7.1@2519.57,-1005 2525,-999.57 2525,-920.43 2559.57,-920.43 2595.43,-884.57 2595.43,-714.57 2620,-690 2660,-690 2680.43,-669.57 2680.43,-650 2680.43,-529.57 2770,-440 U1_RM7.4@2877.32,-440
NetD1_RM8_A: D1_RM8.A R1_RM8.2 | length 99.1
  Top w20: v1(2985,-620) 3034.57,-620 D1_RM8.A@3069.57,-655
NetD1_RM8_C: D1_RM8.C R5_RM8.2 R6_RM8.1 U1_RM8.4 | length 819.7
  Top w20: R6_RM8.1@2979.57,-1010 2985,-1004.57 2985,-925.43 3019.57,-925.43 3055.43,-889.57 3055.43,-719.57 3080,-695 3120,-695 3140.43,-674.57 3140.43,-655 3140.43,-534.57 3230,-445 U1_RM8.4@3337.32,-445
NetD1_RM9_A: D1_RM9.A R1_RM9.2 | length 99.1
  Top w20: D1_RM9.A@290,-14.57 325,20.43 v1(325,70)
NetD1_RM9_C: D1_RM9.C R5_RM9.2 R6_RM9.1 U1_RM9.4 | length 819.7
  Top w20: R6_RM9.1@-65,75.43 -59.57,70 19.57,70 19.57,35.43 55.43,-0.43 225.43,-0.43 250,-25 250,-65 270.43,-85.43 290,-85.43 410.43,-85.43 500,-175 U1_RM9.4@500,-282.32
NetD1_RM10_A: D1_RM10.A R1_RM10.2 | length 99.1
  Top w20: D1_RM10.A@290,450.43 325,485.43 v1(325,535)
NetD1_RM10_C: D1_RM10.C R5_RM10.2 R6_RM10.1 U1_RM10.4 | length 819.7
  Top w20: R6_RM10.1@-65,540.43 -59.57,535 19.57,535 19.57,500.43 55.43,464.57 225.43,464.57 250,440 250,400 270.43,379.57 290,379.57 410.43,379.57 500,290 U1_RM10.4@500,182.68
NetD2_A: D2.A R16.2 | length 71.1
  Top w20: D2.A R16.2
NetD3_A: D3.A R17.2 | length 99
  Top w20: D3.A R17.2
NetJ1_RM1_1: J1_RM1.1 U3_RM1.1 U3_RM1.5
NetJ1_RM2_1: J1_RM2.1 U3_RM2.1 U3_RM2.5
NetJ1_RM3_1: J1_RM3.1 U3_RM3.1 U3_RM3.5
NetJ1_RM4_1: J1_RM4.1 U3_RM4.1 U3_RM4.5
NetJ1_RM5_1: J1_RM5.1 U3_RM5.1 U3_RM5.5
NetJ1_RM6_1: J1_RM6.1 U3_RM6.1 U3_RM6.5
NetJ1_RM7_1: J1_RM7.1 U3_RM7.1 U3_RM7.5
NetJ1_RM8_1: J1_RM8.1 U3_RM8.1 U3_RM8.5
NetJ1_RM9_1: J1_RM9.1 U3_RM9.1 U3_RM9.5
NetJ1_RM10_1: J1_RM10.1 U3_RM10.1 U3_RM10.5
NetP1_2: P1.2 R7.2 | length 102.2
  Top w12: R7.2@1068.71,326.61 R7.2
  Top w20: P1.2 R7.2@1068.71,326.61
NetP2_2: P2.2 R8.2 | length 107.2
  Top w12: R8.2@857.71,326.61 R8.2
  Top w20: P2.2 R8.2@857.71,326.61
NetR2_RM1_1: R2_RM1.1 U3_RM1.4 | length 116.1
  Top w20: v1(30,-1010) 39.88,-1019.88 U3_RM1.4
NetR2_RM2_1: R2_RM2.1 U3_RM2.4 | length 116.1
  Top w20: v1(490,-1010) 499.88,-1019.88 U3_RM2.4
NetR2_RM3_1: R2_RM3.1 U3_RM3.4 | length 116.1
  Top w20: v1(950,-1010) 959.88,-1019.88 U3_RM3.4
NetR2_RM4_1: R2_RM4.1 U3_RM4.4 | length 116.1
  Top w20: v1(1410,-1010) 1419.88,-1019.88 U3_RM4.4
NetR2_RM5_1: R2_RM5.1 U3_RM5.4 | length 116.1
  Top w20: v1(1870,-1010) 1879.88,-1019.88 U3_RM5.4
NetR2_RM6_1: R2_RM6.1 U3_RM6.4 | length 116.1
  Top w20: v1(2330,-1010) 2339.88,-1019.88 U3_RM6.4
NetR2_RM7_1: R2_RM7.1 U3_RM7.4 | length 116.1
  Top w20: v1(2790,-1010) 2799.88,-1019.88 U3_RM7.4
NetR2_RM8_1: R2_RM8.1 U3_RM8.4 | length 116.1
  Top w20: v1(3250,-1015) 3259.88,-1024.88 U3_RM8.4
NetR2_RM9_1: R2_RM9.1 U3_RM9.4 | length 116.1
  Top w20: U3_RM9.4@-182.01,-204.88 -79.88,-204.88 v1(-70,-195)
NetR2_RM10_1: R2_RM10.1 U3_RM10.4 | length 116.1
  Top w20: U3_RM10.4@-182.01,260.12 -79.88,260.12 v1(-70,270)
NetR3_RM1_2: R3_RM1.2 U1_RM1.1
  other v1: -165,-450
NetR3_RM2_2: R3_RM2.2 U1_RM2.1
  other v1: 295,-450
NetR3_RM3_2: R3_RM3.2 U1_RM3.1
  other v1: 755,-450
NetR3_RM4_2: R3_RM4.2 U1_RM4.1
  other v1: 1215,-450
NetR3_RM5_2: R3_RM5.2 U1_RM5.1
  other v1: 1675,-450
NetR3_RM6_2: R3_RM6.2 U1_RM6.1
  other v1: 2135,-450
NetR3_RM7_2: R3_RM7.2 U1_RM7.1
  other v1: 2595,-454
NetR3_RM8_2: R3_RM8.2 U1_RM8.1
  other v1: 3055,-455
NetR3_RM9_2: R3_RM9.2 U1_RM9.1
  other v1: 490,0
NetR3_RM10_2: R3_RM10.2 U1_RM10.1
  other v1: 490,465
NetR6_RM1_2: R6_RM1.2 U3_RM1.2 | length 213.2
  Top w20: R6_RM1.2 -90,-1005 -49.88,-1045.12 U3_RM1.2
NetR6_RM2_2: R6_RM2.2 U3_RM2.2 | length 213.2
  Top w20: R6_RM2.2 370,-1005 410.12,-1045.12 U3_RM2.2
NetR6_RM3_2: R6_RM3.2 U3_RM3.2 | length 213.2
  Top w20: R6_RM3.2 830,-1005 870.12,-1045.12 U3_RM3.2
NetR6_RM4_2: R6_RM4.2 U3_RM4.2 | length 213.2
  Top w20: R6_RM4.2@1210.43,-1005 1290,-1005 1330.12,-1045.12 U3_RM4.2
NetR6_RM5_2: R6_RM5.2 U3_RM5.2 | length 213.2
  Top w20: R6_RM5.2@1670.43,-1005 1750,-1005 1790.12,-1045.12 U3_RM5.2
NetR6_RM6_2: R6_RM6.2 U3_RM6.2 | length 213.2
  Top w20: R6_RM6.2@2130.43,-1005 2210,-1005 2250.12,-1045.12 U3_RM6.2
NetR6_RM7_2: R6_RM7.2 U3_RM7.2 | length 213.2
  Top w20: R6_RM7.2@2590.43,-1005 2670,-1005 2710.12,-1045.12 U3_RM7.2
NetR6_RM8_2: R6_RM8.2 U3_RM8.2 | length 213.2
  Top w20: R6_RM8.2@3050.43,-1010 3130,-1010 3170.12,-1050.12 U3_RM8.2
NetR6_RM9_2: R6_RM9.2 U3_RM9.2 | length 213.2
  Top w20: U3_RM9.2@-182.01,-115.12 -105.12,-115.12 -65,-75 R6_RM9.2@-65,4.57
NetR6_RM10_2: R6_RM10.2 U3_RM10.2 | length 213.2
  Top w20: U3_RM10.2@-182.01,349.88 -105.12,349.88 -65,390 R6_RM10.2@-65,469.57
NetR9_2: R9.2 U2.23 | length 224.1
  Top w12: R9.2@2152.43,162 2173,162 2213,122 U2.23
NetR10_2: R10.2 S1.12 U2.1 | length 875.7
  Top w12: U2.1 2679.18,-6 2735.18,-62 3170,-62 S1.12
  Bottom w12: S1.12 S1.12@3305,73
  Bottom w20: S1.12@3305,73 R10.2
NetR11_2: R11.2 S1.11 U2.2 | length 769.5
  Top w12: U2.2 2679.63,19 2742.63,-44 3088,-44 S1.11
  Bottom w12: S1.11 S1.11@3201,69
  Bottom w20: S1.11@3201,69 R11.2
NetR12_2: R12.2 S1.10 U2.3 | length 663.7
  Top w12: U2.3 2679.09,45 2750.09,-26 3006,-26 S1.10
  Bottom w12: S1.10 S1.10@3097,65
  Bottom w20: S1.10@3097,65 R12.2
NetR13_2: R13.2 S1.9 U2.4 | length 557.5
  Top w12: U2.4 2679.54,70 2757.54,-8 2924,-8 S1.9
  Bottom w12: S1.9 S1.9@2993,61
  Bottom w20: S1.9@2993,61 R13.2
NetR14_2: R14.2 S1.8 U2.5 | length 454.1
  Top w12: U2.5 2679,96 2765,10 2842,10 S1.8
  Bottom w12: S1.8@2889,63 S1.8
  Bottom w20: S1.8@2889,63 R14.2
NetR15_2: R15.2 S1.7 U2.24 | length 974.2
  Top w12: v1(2148,106) 2148,100 2152,96 U2.24
  Bottom w12: v1(2148,106) v1@2154,106 ; S1.7@2785,67 S1.7
  Bottom w20: v1@2154,106 2202.57,154.57 R15.2 S1.7@2785,67
NetR16_1: R16.1 U2.22 | length 188.4
  Top w12: R16.1@2220.02,220.34 2220.02,189.54 2262.57,147 U2.22
PGND: C4.1 C5.1 J1_RM1.2 J1_RM2.2 J1_RM3.2 J1_RM4.2 J1_RM5.2 J1_RM6.2 J1_RM7.2 J1_RM8.2 J1_RM9.2 J1_RM10.2 J2.2 J3.2 R2_RM1.2 R2_RM2.2 R2_RM3.2 R2_RM4.2 R2_RM5.2 R2_RM6.2 R2_RM7.2 R2_RM8.2 R2_RM9.2 R2_RM10.2 U1_RM1.3 U1_RM2.3 U1_RM3.3 U1_RM4.3 U1_RM5.3 U1_RM6.3 U1_RM7.3 U1_RM8.3 U1_RM9.3 U1_RM10.3 | length 5384.9
  Top w20: v1(-125,-310) 374.37,-310 U1_RM9.3 ; v1(-125,155) 374.37,155 U1_RM10.3 ; U1_RM1.3 145,-567.68 v1(145,-1065) ; U1_RM2.3 606.02,-566.65 v1@606.02,-1063.98 ; U1_RM3.3 1066.02,-566.65 v1(1066.02,-1063.98) ; U1_RM4.3 1526.02,-566.65 v1(1526.02,-1063.98) ; U1_RM5.3 2009,-589.63 2009,-1017.11 1986.02,-1040.09 v1(1986.02,-1063.98) ; U1_RM6.3 2446.02,-566.65 v1(2446.02,-1063.98) ; U1_RM7.3 2906.02,-566.65 v1(2906.02,-1063.98) ; U1_RM8.3 3366.02,-571.65 v1(3366.02,-1068.98)
  other v1: 605,-1065
PGND_RM9: 
SCL: K1.5 P2.1 U2.26 | length 2027.7
  Top w12: K1.5 1592,383 1931,44 U2.26@2359,44
  Bottom w20: P2.1 823.89,154 1364,154 1592,382 K1.5
SDA: K1.3 P1.1 U2.27 | length 1705.5
  Top w12: K1.3 1492,448 1921,19 U2.27
  Bottom w20: P1.1 1303.61,226.61 1492,415 K1.3
pads on no net: K1.8 K1.10 K1.12 K1.13 K1.15 K1.16 K1.18 K1.19 K1.21 K1.22 K1.23 K1.24 K1.26 K1.27 K1.28 K1.29 K1.31 K1.32 K1.33 K1.35 K1.36 K1.37 K1.38 K1.40 U2.17 U2.18 U2.19 U2.20 U2.21

## Polygon pours and split planes (outlines as drawn)
GND on Top "Top-No Net 2" (solid, remove dead copper, pour order 25): 563,660 3740,660 3740,-398 563,-398
PGND on Bottom "Top-No Net" (solid, pour order 31): -101,655 -101,-565 -305,-565 -516,-565 -516,-915 -516,-1265 -615,-1265 -615,-125 -615,655
EXT_VCC on Bottom "Top-No Net 2" (solid, remove dead copper, pour order 27): -500,-980 -500,-700 -30,-700 -30,651 225,651 225,-700 3638,-700 3638,-980
PGND on Bottom "Top-No Net 2" (solid, remove dead copper, pour order 28): -438.47,-1030 -612.01,-1030 -612.01,-1265 -612.01,-1546.91 -111.88,-1546.91 93.12,-1546.91 348.12,-1546.91 548.12,-1546.91 803.12,-1546.91 1003.12,-1546.91 1479.88,-1546.91 1624.88,-1546.91 1899.88,-1546.91 2039.88,-1546.91 2324.88,-1546.91 2464.88,-1546.91 2744.88,-1546.91 2889.88,-1546.91 3159.88,-1546.91 3660,-1546.92 3660,-1030
GND on Bottom "Top-No Net 2" (solid, remove dead copper, pour order 26): 451,660 3730,660 3730,-398 451,-398

## Keep-outs
Top:
  lines w14: 2318,173 2360,173 ; 2318,198 2360,198 ; 2318,224 2360,224 ; 2318,250 2360,250 ; 2318,275 2360,275 ; 2590,122 2632,122 ; 2590,147 2632,147 ; 2590,173 2632,173 ; 2590,198 2632,198 ; 2590,250 2632,250 ; 2590,275 2632,275 ; 2590,301 2632,301
  lines w40: -280,-249.76 -165,-249.76 ; -280,215.24 -165,215.24 ; -254.76,-70.24 -182.01,-70.24 ; -254.76,394.76 -182.01,394.76 ; -94.76,-1194.76 -94.76,-1122.01 ; 84.76,-1220 84.76,-1105 ; 365.24,-1194.76 365.24,-1122.01 ; 544.76,-1220 544.76,-1105 ; 825.24,-1194.76 825.24,-1122.01 ; 1004.76,-1220 1004.76,-1105 ; 1285.24,-1194.76 1285.24,-1122.01 ; 1464.76,-1220 1464.76,-1105 ; 1745.24,-1194.76 1745.24,-1122.01 ; 1924.76,-1220 1924.76,-1105 ; 2205.24,-1194.76 2205.24,-1122.01 ; 2384.76,-1220 2384.76,-1105 ; 2665.24,-1194.76 2665.24,-1122.01 ; 2844.76,-1220 2844.76,-1105 ; 3125.24,-1199.76 3125.24,-1127.01 ; 3304.76,-1225 3304.76,-1110
  lines w65: -405,5 -330,5 -275,-50 -275,-240 ; -405,470 -330,470 -275,415 -275,225 ; -170,-1345 -170,-1270 -115,-1215 75,-1215 ; 290,-1345 290,-1270 345,-1215 535,-1215 ; 750,-1345 750,-1270 805,-1215 995,-1215 ; 1210,-1345 1210,-1270 1265,-1215 1455,-1215 ; 1670,-1345 1670,-1270 1725,-1215 1915,-1215 ; 2130,-1345 2130,-1270 2185,-1215 2375,-1215 ; 2590,-1345 2590,-1270 2645,-1215 2835,-1215 ; 3050,-1350 3050,-1275 3105,-1220 3295,-1220
Keep-Out Layer:
  lines w0: -619,-1438 ccw(c-500,-1438) -500,-1557 ; -619,530 cw(c-500.5,529.5) -500,648 3510,648 ; -618.5,-1438 -618.5,530 ; 3509.5,648 cw(c3510,529.5) 3628.5,530 ; 3510,-1557 ccw(c3510,-1438) 3629,-1438 3629,530

## Other copper
Top:
  text "String" at -1138,4345 h60
  text "String" at -1138,4300 h60
  text "String" at -1138,4275 h60

## Silkscreen, mask and mechanical layers (free items; w line width, h text height)
Top Overlay:
  text "LOAD" at -608,515 h32 r270
  text "#10" at -590,385 h32 r270
  text "GND" at -608,305 h32 r270
  text "SCL  SDA" at 690,112 h45
  text "I2C Pull-up" at 634,53 h45
  text "LOAD" at -608,50 h32 r270
  text "6" at 2776,-33 h45
  text "5" at 2876,-33 h45
  text "4" at 2976,-33 h45
  text "2" at 3176,-33 h45
  text "1" at 3276,-33 h45
  text "3" at 3074,-35 h45
  text "#9" at -590,-80 h32 r270
  text "I2C Address" at 2806,-111 h45
  text "RaspPi Hat - MOSFET - v1.1" at 705,-118 h50
  text "GND" at -608,-160 h32 r270
  text "(c) Provectus Engineering 2017" at 705,-218 h50
  text "EXT_VCC" at 3379,-773 h60
  text "5V to 36V" at -595,-780 h60
  text "GND" at 3374,-1263 h60
  text "GND" at -600,-1270 h60
  text "OUTPUT" at 3385,-1326 h60
  text "INPUT" at -520,-1333 h60
  text "#8" at -85,-1530 h32
  text "#7" at 375,-1530 h32
  text "#6" at 835,-1530 h32
  text "#5" at 1295,-1530 h32
  text "#4" at 1755,-1530 h32
  text "#3" at 2215,-1530 h32
  text "#2" at 2675,-1530 h32
  text "#1" at 3135,-1535 h32
  text "LOAD" at -215,-1548 h32
  text "GND" at -5,-1548 h32
  text "LOAD" at 240,-1548 h32
  text "GND" at 450,-1548 h32
  text "LOAD" at 700,-1548 h32
  text "GND" at 910,-1548 h32
  text "LOAD" at 1160,-1548 h32
  text "GND" at 1370,-1548 h32
  text "LOAD" at 1620,-1548 h32
  text "GND" at 1830,-1548 h32
  text "LOAD" at 2080,-1548 h32
  text "GND" at 2290,-1548 h32
  text "LOAD" at 2540,-1548 h32
  text "GND" at 2750,-1548 h32
  text "LOAD" at 3000,-1553 h32
  text "GND" at 3210,-1553 h32
Dimension:
  lines w0: -619,-1438 ccw(c-500,-1438) -500,-1557 3510,-1557 ccw(c3510,-1438) 3629,-1438 3629,530 ; -619,530 cw(c-500.5,529.5) -500,648 3510,648 ; -618.5,-1438 -618.5,530 ; 3509.5,648 cw(c3510,529.5) 3628.5,530
tRestrict:
  circle w123: c-475,-1419 r62
  circle w123: c3484,-1419 r62
  circle w123: c3484,510 r62
  circle w123: c1200,510 r62
bRestrict:
  circle w123: c-475,-1419 r62
  circle w123: c3484,510 r62
  circle w123: c3484,-1419 r62
  circle w123: c1200,510 r62
Unrouted:
  lines w12: 71,991 245,882 ; 145,991 269,991 ; 1392,460 2192,460 3236,-165 3504,98 3504,198 ; 1392,560 1492,560 ; 2692,460 3236,-15 3430,198 ; 2692,560 3236,-65 3430,98 ; 3176,-281 3182,-119 ; 3182,-169 3250,-281